# EAGLE board Magnificent Fyyran (EAGLE 9.6.1)
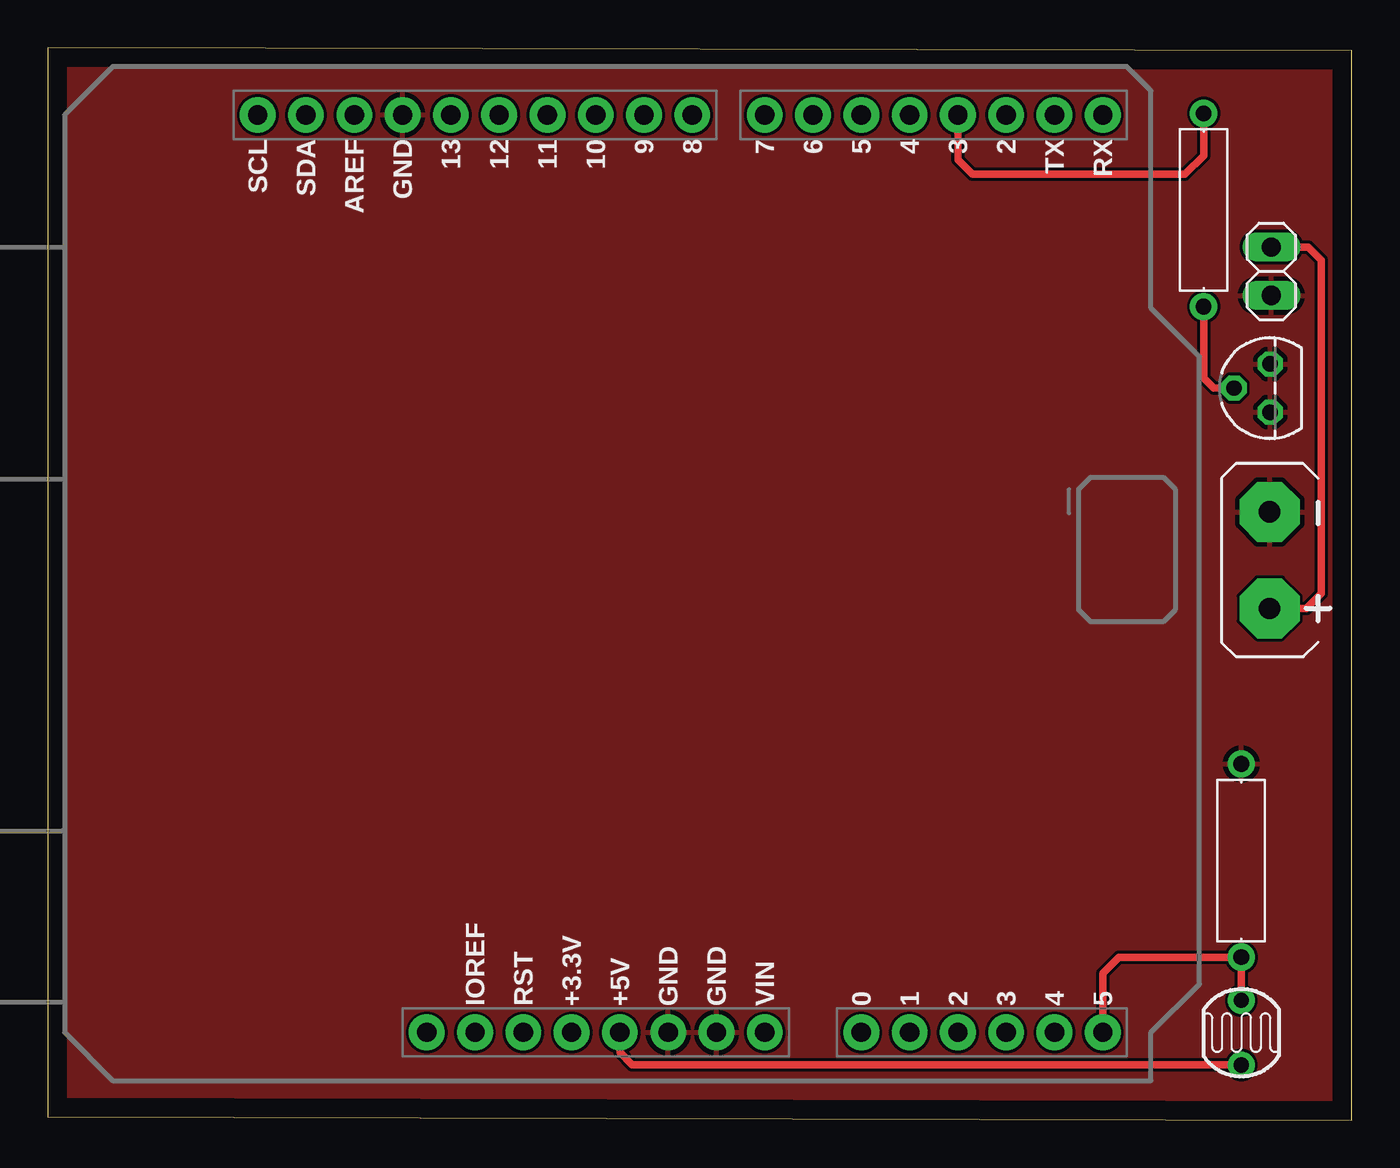
[diagram p0: board, top side]

Size 68.61 x 56.42 mm. Coordinates in mm from the lower left corner, seen from the top.
Outline: 0,0.17 68.6,0 68.61,56.25 0.01,56.42 0,0.17
Copper layers (1*16): Top 0.035mm / dielectric 1.5mm / Bottom 0.035mm
Design rules "default": minimum track width 6mil, minimum drill 0.35mm, track to track 6mil, track to pad 6mil, pad to pad 6mil, via to via 6mil, smd to smd 6mil, copper to edge 40mil, drill to drill 6mil, minimum pad ring 10mil, minimum via ring 8mil, stop-mask expansion 4mil, vias tented up to drill 0mil, thermal gap 10mil

## Footprints (pad centres in the part's own frame; a part is rotated, then mirrored left to right if it is on the bottom)
1X02 = drill 1.016 long: 1 -1.27,0; 2 1.27,0
BATTERY-GENERIC = drill 1.118 pad 3.15 octagon: + 2.54,0; - -2.54,0
GL5528 = drill 0.8 pad 1.4: 1 -1.702,0; 2 1.702,0
RESAD1016W63L850D250B = drill 0.83 pad 1.43: 1 -5.08,0; 2 5.08,0
TO92 = drill 0.813 octagon: 1 -1.27,0; 2 0,1.905; 3 1.27,0
ARDUINO-UNO-R3-SHIELD = drill 1.016 pad 1.88: 3.3V 24.13,-2.54; 5V 24.13,0; A0 24.13,12.7; A1 24.13,15.24; A2 24.13,17.78; A3 24.13,20.32; A4 24.13,22.86; A5 24.13,25.4; AREF -24.13,-13.97; D2 -24.13,20.32; D3 -24.13,17.78; D4 -24.13,15.24; D5 -24.13,12.7; D6 -24.13,10.16; D7 -24.13,7.62; D8 -24.13,3.81; D9 -24.13,1.27; D10 -24.13,-1.27; D11 -24.13,-3.81; D12 -24.13,-6.35; D13 -24.13,-8.89; GND@0 24.13,2.54; GND@1 24.13,5.08; GND@2 -24.13,-11.43; IOREF 24.13,-7.62; NC 24.13,-10.16; RES 24.13,-5.08; RX -24.13,25.4; SCL -24.13,-19.05; SDA -24.13,-16.51; TX -24.13,22.86; VIN 24.13,7.62

## Placement (x,y rotation side)
L1  LIGHTBULB  [1X02]  64.37,44.65 90 top
P1  BATTERYGENERIC  [BATTERY-GENERIC]  64.28,29.46 270 top
R1  PHOTOCELL_GL5528  [GL5528]  62.79,4.6 270 top
R2  1k  [RESAD1016W63L850D250B]  62.79,13.65 270 top
R3  1k  [RESAD1016W63L850D250B]  60.81,47.88 270 top
T1  NPN  [TO92]  64.32,38.51 90 top
U1  ARDUINO-UNO-R3-SHIELD  [ARDUINO-UNO-R3-SHIELD]  30.11,28.75 270 top

## Library data of the parts
L1 P1 R1-R3 U1 = Tinkercad
T1 = Tinkercad; CATEGORY: Transistor; SUB-CATEGORY: BJT; TYPE: NPN

## Nets
GND: L1.1 P1.- R2.1 T1.1 T1.3 U1.GND@0 U1.GND@1 U1.GND@2
P1+: L1.2 P1.+
T1_B: R3.2 T1.2
U1_5V: R1.2 U1.5V
U1_A5: R1.1 R2.2 U1.A5
U1_D3: R3.1 U1.D3

## Tracks (layer width: path | path; a pad name or v marks a point on that pad's centre or on a via)
GND
  pour Top: 0,0.17 69,0.17 69,56.17 0,56.17
P1+
  Top 0.406: P1.+ 66.22,26.92 67.01,27.71 67.01,45.23 66.32,45.92 L1.2
T1_B
  Top 0.406: R3.2 60.81,39.04 61.34,38.51 T1.2
U1_5V
  Top 0.406: U1.5V 30.11,3.55 30.74,2.92 62.77,2.92 R1.2
U1_A5
  Top 0.406: R1.1 R2.2 56.35,8.57 55.51,7.72 U1.A5
U1_D3
  Top 0.406: U1.D3 47.88,50.52 48.65,49.75 59.83,49.75 60.81,50.73 R3.1